# Altium PCB LCDTest.PcbDoc (part 1 of 2)
Units mm, origin at the board's own origin, x right, y up, seen from the top; angles counter-clockwise.
Board outline 42.58 x 45.09 mm, 4 copper layers (Top Layer, Internal Plane 1, Signal Layer 1, Bottom Layer), stack 0.72 mm thick; 136 components, 113 nets, 730 pads, 484 vias.
Unrouted connection lines stored in the file: 1.
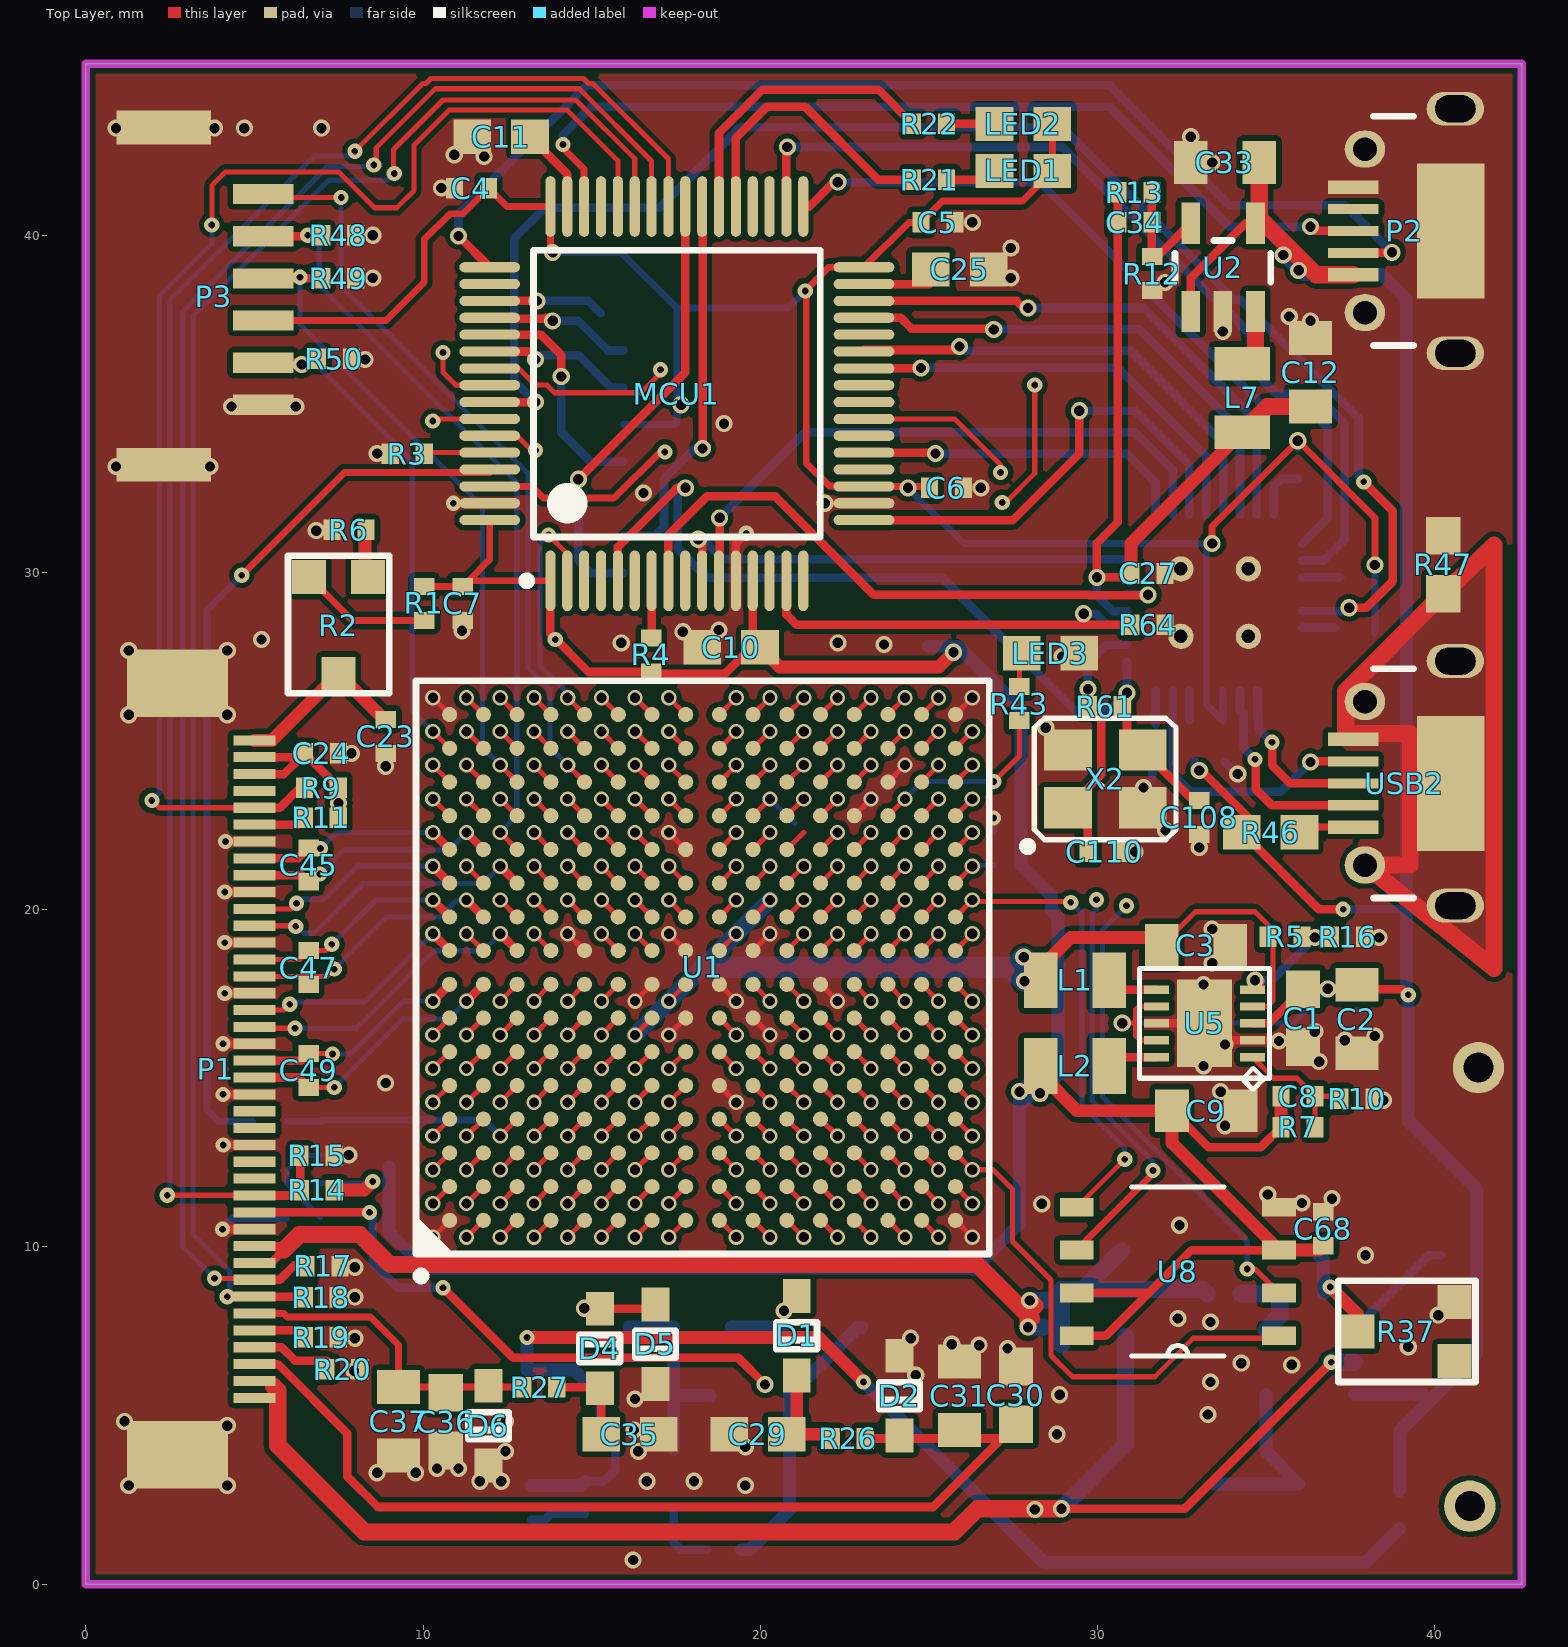
[diagram p0: Top Layer view]
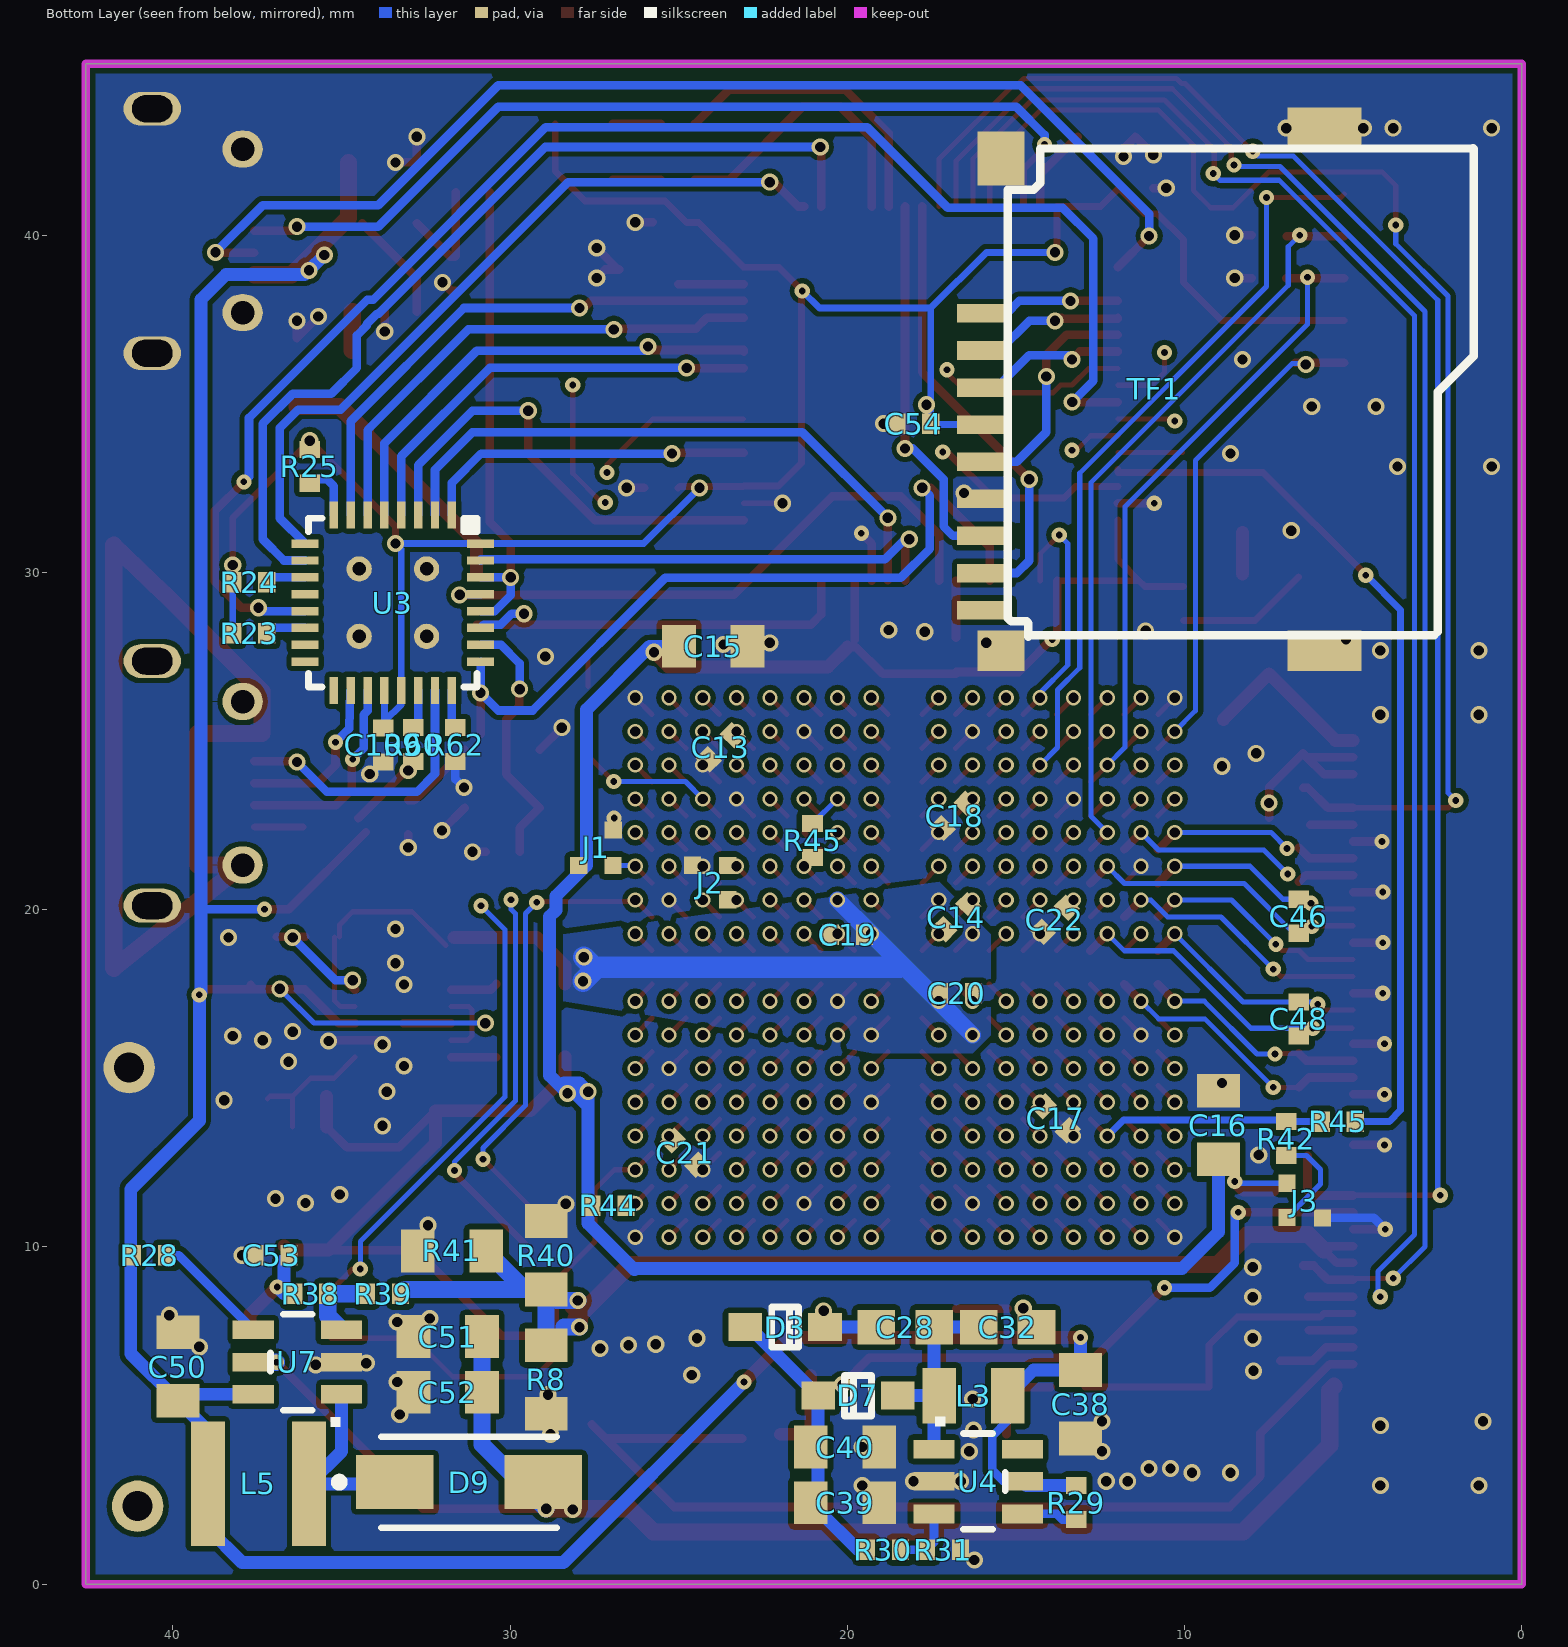
[diagram p1: Bottom Layer view, seen from below]
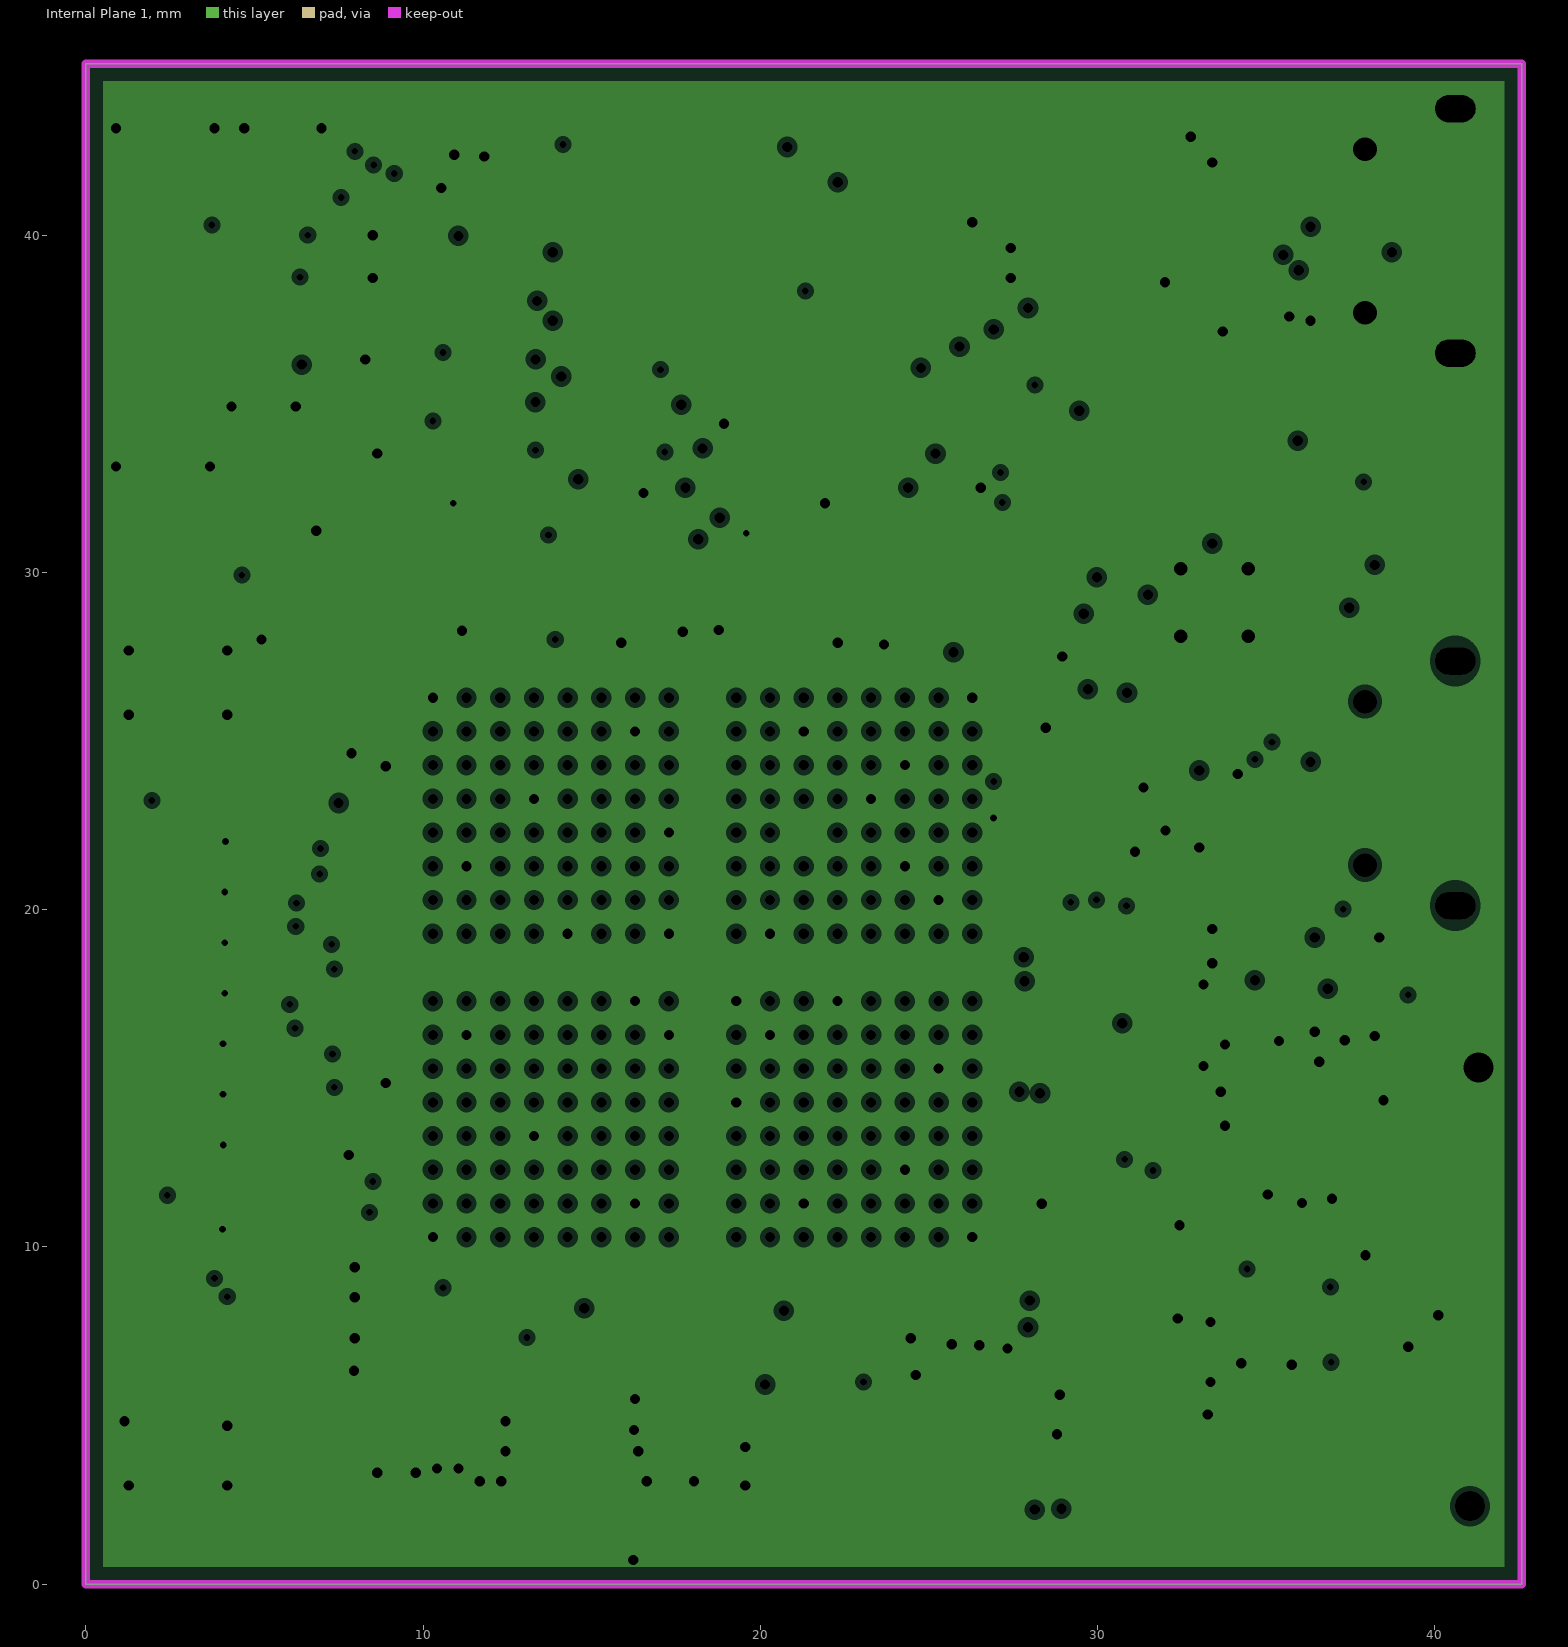
[diagram p2: Internal Plane 1, clearances drawn from the general rule]
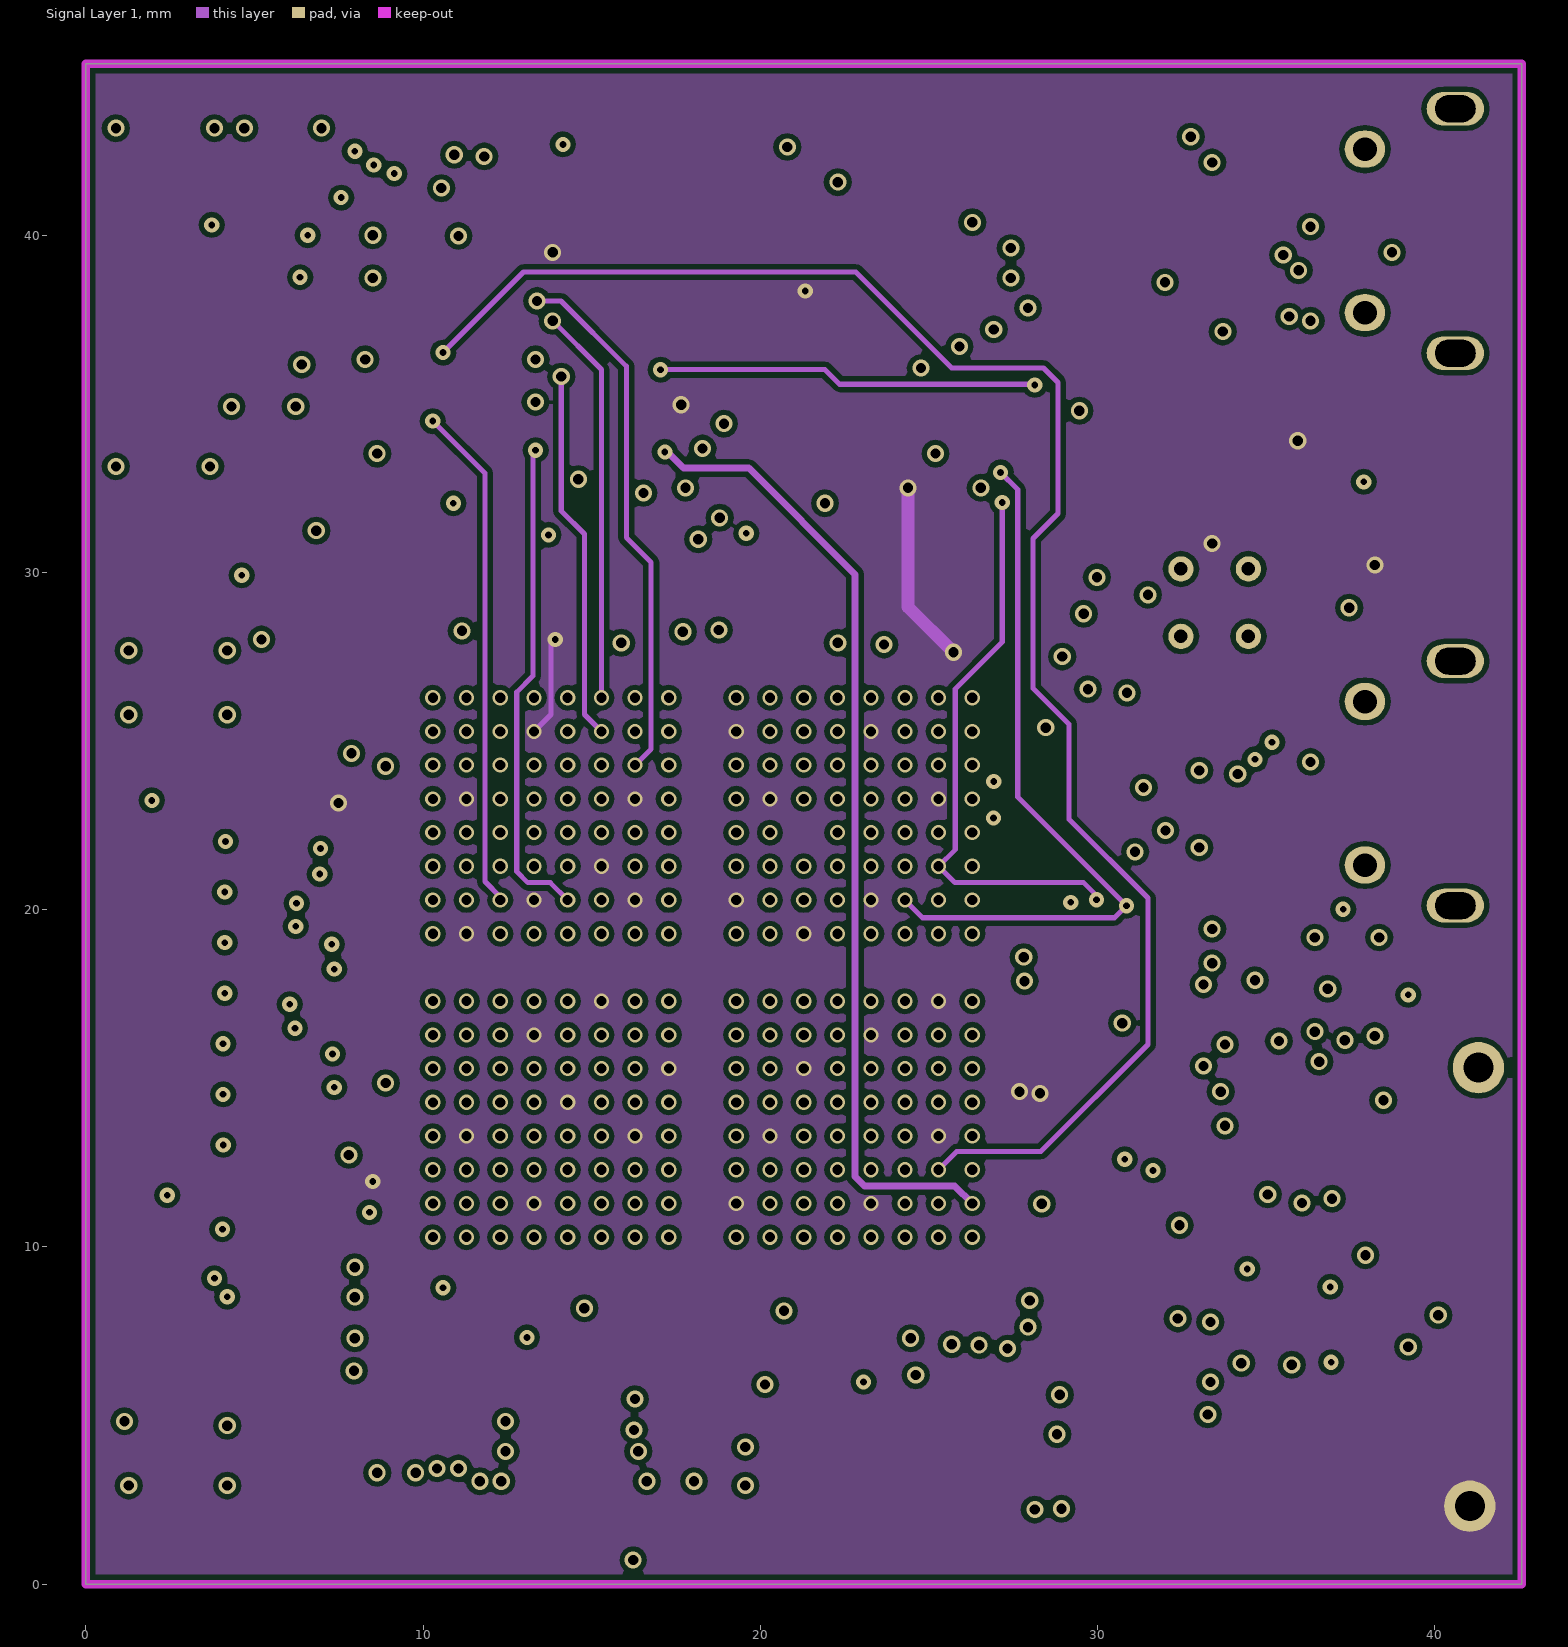
[diagram p3: Signal Layer 1]

## Layer stack, top to bottom
Top Solder: solder mask 0.0102, Solder Resist, Dk 3.5
Top Layer: signal copper 0.0356
Dielectric 1: core 0.196, FR-4, Dk 4.2
Internal Plane 1: plane copper 0.036, net GND
Dielectric 4: prepreg 0.127, Dk 4.2
Signal Layer 1: signal copper 0.036
Dielectric 3: core 0.254, Dk 4.2
Bottom Layer: signal copper 0.0356
Bottom Solder: solder mask 0.0102, Solder Resist, Dk 3.5

## Board outline
0,0 42.581,0 42.581,45.085 0,45.085

## Design rules (kind name [scope] priority, off if disabled: settings)
Clearance PowerPour [InPolygon AND (InNet('1.8D') OR InNet('1.2') OR InNet('3.3D'))] p1: gap=0.152 ignorepadtopadclearanceinfootprint=FALSE except(0: Arc-Hole Track-Hole SMDPad-Hole THPad-Hole Via-Hole Fill-Hole Poly-Hole Region-Hole Text-Hole)
Clearance "50R trace" [InNetClass('50R') vs InPolygon] p2: gap=0.508 ignorepadtopadclearanceinfootprint=FALSE except(0: Arc-Hole Track-Hole SMDPad-Hole THPad-Hole Via-Hole Fill-Hole Poly-Hole Region-Hole Text-Hole)
Clearance [All] p3: gap=0.152 ignorepadtopadclearanceinfootprint=FALSE except(0: Arc-Hole Track-Hole SMDPad-Hole THPad-Hole Via-Hole Fill-Hole Poly-Hole Region-Hole Text-Hole)
DiffPairsRouting USB_HS [InNet('USB_HS_P')     or InNet('USB_HS_N')] p1: maxlimit=0.254 minlimit=0.152 mostfreqgap=0.152 toplayer_minwidth=0.254 toplayer_maxwidth=0.381 toplayer_prefwidth=0.381 midlayer1_minwidth=0.305 midlayer1_maxwidth=0.381 midlayer1_prefwidth=0.381 bottomlayer_minwidth=0.254 bottomlayer_maxwidth=0.381 bottomlayer_prefwidth=0.381 maxuncoupledlength=12.7
DiffPairsRouting [All] p2: maxlimit=0.254 minlimit=0.152 mostfreqgap=0.203 toplayer_minwidth=0.152 toplayer_maxwidth=0.381 toplayer_prefwidth=0.254 midlayer1_minwidth=0.152 midlayer1_maxwidth=0.381 midlayer1_prefwidth=0.254 bottomlayer_minwidth=0.152 bottomlayer_maxwidth=0.381 bottomlayer_prefwidth=0.254 maxuncoupledlength=12.7
HoleToHoleClearance [All] p1: gap=0.2 allowstackedmicrovias=TRUE
MatchedLengths [InNet('USB_HS_P') or InNet('USB_HS_N')] p1: tolerance=1.27 checknetsindiffpair=TRUE checkdiffpairvsdiffpair=FALSE checkxsignals=FALSE checkothers=FALSE
MinimumSolderMaskSliver [All] p1 off: minsoldermaskwidth=0.254
PlaneClearance [All] p1: clearance=0.152
PlaneConnect [All] p1: planeconnectstyle=Direct reliefexpansion=0.508 reliefentries=4 reliefconductorwidth=0.254 reliefairgap=0.254
PolygonConnect [All] p1: connectstyle=Direct reliefconductorwidth=0.254 reliefentries=4 polygonreliefangle="90 Angle" airgapwidth=0.254
RoomDefinition USB_HS_PHY [InComponentClass('USB_HS_PHY')] p1 off: confinementstyle=ConfineIn formatcopy=TRUE lockcomponents=FALSE outline 43.866,96.19 145.009,96.19 145.009,105.334 43.866,105.334
RoomDefinition mcu [InComponentClass('mcu')] p2 off: confinementstyle=ConfineIn formatcopy=TRUE lockcomponents=FALSE outline 43.866,55.042 171.45,55.042 171.45,71.349 43.866,71.349
RoomDefinition LCD [InComponentClass('LCD')] p3 off: confinementstyle=ConfineIn formatcopy=TRUE lockcomponents=FALSE outline 43.866,25.984 118.288,25.984 118.288,53.772 43.866,53.772
RoomDefinition FPGA [InComponentClass('FPGA')] p4 off: confinementstyle=ConfineIn formatcopy=TRUE lockcomponents=FALSE outline 43.866,2.819 119.456,2.819 119.456,24.714 43.866,24.714
RoomDefinition power [InComponentClass('power')] p5 off: confinementstyle=ConfineIn formatcopy=TRUE lockcomponents=FALSE outline 72.542,9.017 109.398,9.017 109.398,26.746 72.542,26.746
RoutingVias [All] p1: holewidth=0.3 width=0.45 viastyle="Through Hole" minholewidth=0.2 minwidth=0.45 maxholewidth=0.711 maxwidth=1.27
ShortCircuit ShortCircuit_NoNet [not InAnyNet vs not InAnyNet] p1: allowed=TRUE
ShortCircuit [not InNet('No Net') vs not InNet('No Net')] p2: allowed=FALSE
SilkToBoardRegionClearance [All] p1 off:
SilkToSilkClearance [All] p1 off: silktosilkclearance=0.254
SilkToSolderMaskClearance [IsPad] p1 off: minsilkscreentomaskgap=0.254 clearancetoexposedcopper=TRUE
SolderMaskExpansion [All] p1: expansion=0.051
Width Width_1 [InNetClass('50R')] p1: maxlimit=0.752 minlimit=0.134 preferedwidth=0.64 toplayer_minwidth=0.232 toplayer_maxwidth=0.33 toplayer_prefwidth=0.277 midlayer1_maxwidth=0.198 midlayer1_prefwidth=0.164 bottomlayer_minwidth=0.544 impedancedriven=TRUE minimp=45.000000 maximp=55.000000 favimp=50.000000
Width [All] p2: maxlimit=1.524 minlimit=0.152 preferedwidth=0.152
21 further rules are at their usual default settings.

## Classes and differential pairs
net class FPGA_IO[7..0]: FPGA_IO0 FPGA_IO1 FPGA_IO2 FPGA_IO3 FPGA_IO4 FPGA_IO5 FPGA_IO6 FPGA_IO7
net class USB_HS_D[9..0]: USB_HS_D0 USB_HS_D1 USB_HS_D2 USB_HS_D3 USB_HS_D4 USB_HS_D5 USB_HS_D6 USB_HS_D7 USB_HS_D8 USB_HS_D9
component class USB_HS_PHY: C27 C108 C109 C110 R23 R24 R25 R46 R47 R60 R61 R62 R64 U3 USB2 X2
component class mcu: C4 C5 C6 C7 C10 C11 C25 C54 LED1 LED2 MCU1 P2 R3 R4 R21 R22 TF1
component class LCD: C23 C24 C45 C46 C47 C48 C49 P1 R1 R2 R6 R9 R11 R14 R15 R17 R18 R19 R20
component class FPGA: C13 C14 C15 C16 C17 C18 C19 C20 C21 C22 C68 J1 J2 J3 LED3 P3 R42 R43 R44 R45 R48 R49 R50 U1 U8
component class power: C1 C2 C3 C8 C9 C12 C28 C29 C30 C31 C32 C33 C34 C35 C36 C37 C38 C39 C40 C50 C51 C52 C53 D1 D2 D3 D4 D5 D6 D7 D9 L1 L2 L3 L5 L7 R5 R7 R8 R10 R12 R13 R16 R26 R27 R28 R29 R30 R31 R37 R38 R39 R40 R41 U2 U4 U5 U7
differential pair USB_HS: +USB_HS_P -USB_HS_N
differential pair CK: +CK_P -CK_N
differential pair D0: +D0_P -D0_N
differential pair D1: +D1_P -D1_N
differential pair D2: +D2_P -D2_N
differential pair D3: +D3_P -D3_N

## Components (designator, comment, footprint, x,y, rotation, side; value= is the part's Value field where it differs from the comment)
C1 "1uF" 0603 36.097,16.781 r90 top
C2 "10UF" 0805 37.697,16.755 r90 top
C3 "10uF" 0805 32.922,18.94 r180 top
C4 "0.1uF * 4" 0402 11.43,41.402 r0 top
C5 "1n" 0402 25.273,40.386 r180 top
C6 "1n" 0402 25.527,32.512 r180 top
C7 "1n" 0402 11.176,29.083 r90 top
C8 "33pF" 0402 35.944,14.469 r0 top
C9 "10uF" 0805 33.226,14.037 r180 top
C10 "4.7uF" 0603 19.126,27.788 r0 top
C11 "2.2uF" 0603 12.319,42.926 r180 top
C12 "Cap" 0805 36.322,35.941 r270 top
C13 "0.1uF" 0402 23.749,24.816 r315 bottom
C14 "0.1uF" 0402 16.764,19.787 r315 bottom
C15 "Cap" 0805 23.978,27.813 r0 bottom
C16 "Cap" 0805 8.992,13.614 r270 bottom
C17 "0.1uF" 0402 13.818,13.818 r225 bottom
C18 "0.1uF" 0402 16.815,22.784 r315 bottom
C19 "0.1uF" 0402 19.99,19.253 r0 bottom
C20 "0.1uF" 0402 16.764,17.526 r180 bottom
C21 "0.1uF" 0402 24.816,12.802 r225 bottom
C22 "0.1uF" 0402 13.843,19.71 r315 bottom
C23 "0.1uF" 0402 8.89,25.146 r270 top
C24 "1uF" 0402 6.985,24.638 r0 top
C25 "2.2uF" 0603 25.908,38.989 r0 top
C27 "1uF" 0402 31.496,29.972 r0 top
C28 "1uF" 0603 18.288,7.62 r180 bottom
C29 "0.1uF" 0603 19.939,4.445 r180 top
C30 "1uF" 0603 27.584,5.588 r90 top
C31 "10uF" 0805 25.908,5.588 r270 top
C32 "1uF" 0603 15.24,7.62 r0 bottom
C33 "Cap" 0805 33.782,42.164 r0 top
C34 "22pF" 0402 31.115,40.386 r0 top
C35 "0.1uF" 0603 16.129,4.445 r0 top
C36 "1uF" 0603 10.668,4.826 r270 top
C37 "10uF" 0805 9.271,4.826 r90 top
C38 "10uF" 0805 13.081,5.334 r90 bottom
C39 "10uF" 0805 20.066,2.413 r0 bottom
C40 "10uF" 0805 20.066,4.064 r0 bottom
C45 "NC" 0402 6.604,21.336 r270 top
C46 "NC" 0402 6.604,19.812 r270 bottom
C47 "NC" 0402 6.604,18.288 r270 top
C48 "NC" 0402 6.604,16.764 r270 bottom
C49 "NC" 0402 6.604,15.24 r270 top
C50 "10uF" 0805 39.853,6.452 r270 bottom
C51 "10uF" 0805 31.852,7.341 r180 bottom
C52 "10uF" 0805 31.852,5.69 r180 bottom
C53 "0.1uF" 0402 37.059,9.754 r0 bottom
C54 "0.1uF" 0402 18.034,34.417 r180 bottom
C68 "0.1uF" 0402 36.703,10.541 r270 top
C108 "10pF" 0402 33.02,22.733 r90 top
C109 "1uF" 0402 33.757,24.892 r270 bottom
C110 "10pF" 0402 30.226,21.717 r180 top
D1 "Diode 1N4148" LC-SOD-323 21.082,7.366 r90 top
D2 "D Zener, 15V" LC-SOD-323 24.13,5.588 r90 top
D3 "Diode 1N4148" LC-SOD-323 21.844,7.62 r0 bottom
D4 "Diode 1N4148" LC-SOD-323 15.24,6.985 r270 top
D5 "Diode 1N4148" LC-SOD-323 16.891,7.112 r90 top
D6 "D Zener, 6.8V" LC-SOD-323 11.938,4.699 r90 top
D7 "Diode" LC-SOD-323 19.685,5.588 r180 bottom
D9 "Diode" SMA 31.217,3.023 r180 bottom
J1 "jumper" 0402J 26.949,21.311 r0 bottom
J2 "jumper" 0402J 23.546,21.311 r270 bottom
J3 "jumper" 0402J 6.96,10.871 r90 bottom
L1 "2.2UH" 0806 29.337,17.907 r180 top
L2 "2.2uH" 0806 29.337,15.367 r180 top
L3 "10uH" 0806 16.256,5.588 r0 bottom
L5 "6.8uH" L4015 38.964,2.972 r180 bottom
L7 "2.2uH" 0806 34.29,35.179 r270 top
LED1 "LED0" 0603 27.813,41.91 r180 top
LED2 "LED0" 0603 27.813,43.307 r180 top
LED3 "LED0" 0603 28.6,27.61 r0 top
MCU1 "STM32F103R8T6" LQFP64_N 17.526,35.306 r90 top
P1 "LCD_40P_LVDS" FPC-0.5mm-40 5,25.024 r270 top
P2 "SWD_MicroUSB" MICRO-YZX 43.434,40.132 r90 top
P3 "JTAG-6P" GH1.25-6 3.81,38.1 r270 top
R1 "0R" 0402 10.033,29.083 r90 top
R2 "RPot" POT1 7.493,28.321 r180 top
R3 "10k" 0402 9.525,33.528 r0 top
R4 "10k" 0402 16.764,27.559 r270 top
R5 "180k" 0402 35.563,19.194 r0 top
R6 "1k" 0402 7.798,31.267 r0 top
R7 "300k" 0402 35.944,13.555 r0 top
R8 "1R" 0805 28.931,6.071 r90 bottom
R9 "10k" 0402 6.985,23.622 r180 top
R10 "68k" 0402 37.697,14.393 r0 top
R11 "10k" 0402 6.985,22.733 r180 top
R12 "10k" 0402 31.623,38.862 r90 top
R13 "45k" 0402 31.115,41.275 r180 top
R14 "10k" 0402 6.858,11.684 r0 top
R15 "NC" 0402 6.858,12.7 r180 top
R16 "180k" 0402 37.417,19.194 r0 top
R17 "10k" 0402 7.036,9.423 r180 top
R18 "10k" 0402 6.985,8.509 r180 top
R19 "10k" 0402 6.985,7.315 r180 top
R20 "10k" 0402 7.62,6.375 r180 top
R21 "10k" 0402 25.019,41.656 r0 top
R22 "10k" 0402 25.019,43.307 r0 top
R23 "10k" 0402 37.719,28.194 r0 bottom
R24 "10k" 0402 37.719,29.718 r0 bottom
R25 "10k" 0402 35.941,33.147 r90 bottom
R26 "1k" 0402 22.606,4.318 r0 top
R27 "1k" 0402 13.462,5.842 r180 top
R28 "45k" 0402 40.691,9.754 r0 bottom
R29 "45k" 0402 13.208,2.413 r90 bottom
R30 "150k" 0402 18.923,1.016 r0 bottom
R31 "10k" 0402 17.145,1.016 r0 bottom
R37 "RPot" POT1 39.04,7.493 r90 top
R38 "1k" 0402 35.916,8.611 r180 bottom
R39 "1k" 0402 33.757,8.611 r0 bottom
R40 "1R" 0805 28.931,9.754 r270 bottom
R41 "1R" 0805 31.725,9.881 r180 bottom
R42 "10k" 0402 6.985,13.208 r90 bottom
R43 "10k" 0402 27.686,26.111 r90 top
R44 "10k" 0402 27.076,11.227 r180 bottom
R45 "1k" 0402 5.436,13.716 r0 bottom
R45 "NC" 0402 21.031,22.047 r90 bottom
R46 "FB" 0603 35.128,22.301 r0 top
R47 "FB" 0603 40.259,30.226 r90 top
R48 "10k" 0402 7.493,40.005 r0 top
R49 "10k" 0402 7.493,38.735 r0 top
R50 "10k" 0402 7.366,36.347 r0 top
R60 "10k" 0402 32.868,24.892 r90 bottom
R61 "1MR" 0402 30.226,26.035 r0 top
R62 "8.06k 1%" 0402 31.623,24.892 r90 bottom
R64 "10k" 0402 31.496,28.448 r0 top
TF1 "TF" TF 5.842,27.686 r90 bottom
U1 "XC6SLX16-2FT256C" FT256 18.288,18.288 r90 top
U2 "RT8059" SOT23-5 33.718,39.039 r0 top
U3 "USB3320" USB3300 33.477,29.108 r270 bottom
U4 "SY7152" SOT23-6 16.129,3.048 r270 bottom
U5 "Tps62410" DFN-10P-3X3 33.15,16.628 r180 top
U7 "SY7200" SOT23-6 36.297,6.579 r90 bottom
U8 "M25P16" SO8 32.385,9.271 r180 top
USB2 "USB Micro Type B" MICRO-YZX 43.434,23.749 r90 top
X2 "24mhz" OSCILLATOR-3.2X2.5 30.226,23.876 r0 top

## Footprints (in the part's own frame and the unit in brackets; to place one, negate y for a bottom-side part, rotate by r counter-clockwise, add the part's x,y. Pads: shape width x height; smd on the part's side, far side on the other; paste and mask are expansions set on the pad)
0402 [mil] "0402-RES"
  rect 20x24 smd: 1(-19.68,0) 2(20,0)
0402J [mil] "0402-RES"
  rect 20x20 smd: 1(40,0) 2(0,0) 3(-0.35,-41.34)
0603 [mil] "0603-RES"
  rect 44x40 smd: 1(-33.46,0) 2(34,0)
0805 [mm]
  rect 1x1.27 smd: 1(-1.016,0) 2(1.016,0)
  body extent -1.27,-0.76 1.27,0.76, height 0.8
0806 [mm]
  rect 1x1.65 smd: 1(-1.016,0) 2(1.016,0)
  body extent -1,-0.8 1,0.8, height 0.5
DFN-10P-3X3 [mm]
  rect 0.75x0.25 smd mask+0.064: 1(-1.451,0.999) 2(-1.451,0.499) 3(-1.451,-0.001) 4(-1.451,-0.501) 5(-1.451,-1.001) 6(1.4,-1.001) 7(1.4,-0.501) 8(1.4,-0.001) 9(1.4,0.499) 10(1.4,0.999)
  rect 1.64x2.6 smd: 11(-0.025,-0.001)
  silkscreen extent -1.96,-1.63 1.9,1.95
FPC-0.5mm-40 [mm]
  rect 2x3 smd: 0(-1.69,-2.285) 0(21.19,-2.285)
  rect 0.3x1.25 smd: 1(0,0) 2(0.5,0) 3(1,0) 4(1.5,0) 5(2,0) 6(2.5,0) 7(3,0) 8(3.5,0) 9(4,0) 10(4.5,0) 11(5,0) 12(5.5,0) 13(6,0) 14(6.5,0) 15(7,0) 16(7.5,0) 17(8,0) 18(8.5,0) 19(9,0) 20(9.5,0) 21(10,0) 22(10.5,0) 23(11,0) 24(11.5,0) 25(12,0) 26(12.5,0) 27(13,0) 28(13.5,0) 29(14,0) 30(14.5,0) 31(15,0) 32(15.5,0) 33(16,0) 34(16.5,0) 35(17,0) 36(17.5,0) 37(18,0) 38(18.5,0) 39(19,0) 40(19.5,0)
FT256 [mm] "BGA, 256-Leads, Body 17x17mm, Pitch 1mm"
  round 0.45 smd: A1(-7.5,7.5) A2(-6.5,7.5) A3(-5.5,7.5) A4(-4.5,7.5) A5(-3.5,7.5) A6(-2.5,7.5) A7(-1.5,7.5) A8(-0.5,7.5) A9(0.5,7.5) A10(1.5,7.5) A11(2.5,7.5) A12(3.5,7.5) A13(4.5,7.5) A14(5.5,7.5) A15(6.5,7.5) A16(7.5,7.5) B1(-7.5,6.5) B2(-6.5,6.5) B3(-5.5,6.5) B4(-4.5,6.5) B5(-3.5,6.5) B6(-2.5,6.5) B7(-1.5,6.5) B8(-0.5,6.5) B9(0.5,6.5) B10(1.5,6.5) B11(2.5,6.5) B12(3.5,6.5) B13(4.5,6.5) B14(5.5,6.5) B15(6.5,6.5) B16(7.5,6.5) C1(-7.5,5.5) C2(-6.5,5.5) C3(-5.5,5.5) C4(-4.5,5.5) C5(-3.5,5.5) C6(-2.5,5.5) C7(-1.5,5.5) C8(-0.5,5.5) C9(0.5,5.5) C10(1.5,5.5) C11(2.5,5.5) C12(3.5,5.5) C13(4.5,5.5) C14(5.5,5.5) C15(6.5,5.5) C16(7.5,5.5) D1(-7.5,4.5) D2(-6.5,4.5) D3(-5.5,4.5) D4(-4.5,4.5) D5(-3.5,4.5) D6(-2.5,4.5) D7(-1.5,4.5) D8(-0.5,4.5) D9(0.5,4.5) D10(1.5,4.5) D11(2.5,4.5) D12(3.5,4.5) D13(4.5,4.5) D14(5.5,4.5) D15(6.5,4.5) D16(7.5,4.5) E1(-7.5,3.5) E2(-6.5,3.5) E3(-5.5,3.5) E4(-4.5,3.5) E5(-3.5,3.5) E6(-2.5,3.5) E7(-1.5,3.5) E8(-0.5,3.5) E9(0.5,3.5) E10(1.5,3.5) E11(2.5,3.5) E12(3.5,3.5) E13(4.5,3.5) E14(5.5,3.5) E15(6.5,3.5) E16(7.5,3.5) F1(-7.5,2.5) F2(-6.5,2.5) F3(-5.5,2.5) F4(-4.5,2.5) F5(-3.5,2.5) F6(-2.5,2.5) F7(-1.5,2.5) F8(-0.5,2.5) F9(0.5,2.5) F10(1.5,2.5) F11(2.5,2.5) F12(3.5,2.5) F13(4.5,2.5) F14(5.5,2.5) F15(6.5,2.5) F16(7.5,2.5) G1(-7.5,1.5) G2(-6.5,1.5) G3(-5.5,1.5) G4(-4.5,1.5) G5(-3.5,1.5) G6(-2.5,1.5) G7(-1.5,1.5) G8(-0.5,1.5) G9(0.5,1.5) G10(1.5,1.5) G11(2.5,1.5) G12(3.5,1.5) G13(4.5,1.5) G14(5.5,1.5) G15(6.5,1.5) G16(7.5,1.5) H1(-7.5,0.5) H2(-6.5,0.5) H3(-5.5,0.5) H4(-4.5,0.5) H5(-3.5,0.5) H6(-2.5,0.5) H7(-1.5,0.5) H8(-0.5,0.5) H9(0.5,0.5) H10(1.5,0.5) H11(2.5,0.5) H12(3.5,0.5) H13(4.5,0.5) H14(5.5,0.5) H15(6.5,0.5) H16(7.5,0.5) J1(-7.5,-0.5) J2(-6.5,-0.5) J3(-5.5,-0.5) J4(-4.5,-0.5) J5(-3.5,-0.5) J6(-2.5,-0.5) J7(-1.5,-0.5) J8(-0.5,-0.5) J9(0.5,-0.5) J10(1.5,-0.5) J11(2.5,-0.5) J12(3.5,-0.5) J13(4.5,-0.5) J14(5.5,-0.5) J15(6.5,-0.5) J16(7.5,-0.5) K1(-7.5,-1.5) K2(-6.5,-1.5) K3(-5.5,-1.5) K4(-4.5,-1.5) K5(-3.5,-1.5) K6(-2.5,-1.5) K7(-1.5,-1.5) K8(-0.5,-1.5) K9(0.5,-1.5) K10(1.5,-1.5) K11(2.5,-1.5) K12(3.5,-1.5) K13(4.5,-1.5) K14(5.5,-1.5) K15(6.5,-1.5) K16(7.5,-1.5) L1(-7.5,-2.5) L2(-6.5,-2.5) L3(-5.5,-2.5) L4(-4.5,-2.5) L5(-3.5,-2.5) L6(-2.5,-2.5) L7(-1.5,-2.5) L8(-0.5,-2.5) L9(0.5,-2.5) L10(1.5,-2.5) L11(2.5,-2.5) L12(3.5,-2.5) L13(4.5,-2.5) L14(5.5,-2.5) L15(6.5,-2.5) L16(7.5,-2.5) M1(-7.5,-3.5) M2(-6.5,-3.5) M3(-5.5,-3.5) M4(-4.5,-3.5) M5(-3.5,-3.5) M6(-2.5,-3.5) M7(-1.5,-3.5) M8(-0.5,-3.5) M9(0.5,-3.5) M10(1.5,-3.5) M11(2.5,-3.5) M12(3.5,-3.5) M13(4.5,-3.5) M14(5.5,-3.5) M15(6.5,-3.5) M16(7.5,-3.5) N1(-7.5,-4.5) N2(-6.5,-4.5) N3(-5.5,-4.5) N4(-4.5,-4.5) N5(-3.5,-4.5) N6(-2.5,-4.5) N7(-1.5,-4.5) N8(-0.5,-4.5) N9(0.5,-4.5) N10(1.5,-4.5) N11(2.5,-4.5) N12(3.5,-4.5) N13(4.5,-4.5) N14(5.5,-4.5) N15(6.5,-4.5) N16(7.5,-4.5) P1(-7.5,-5.5) P2(-6.5,-5.5) P3(-5.5,-5.5) P4(-4.5,-5.5) P5(-3.5,-5.5) P6(-2.5,-5.5) P7(-1.5,-5.5) P8(-0.5,-5.5) P9(0.5,-5.5) P10(1.5,-5.5) P11(2.5,-5.5) P12(3.5,-5.5) P13(4.5,-5.5) P14(5.5,-5.5) P15(6.5,-5.5) P16(7.5,-5.5) R1(-7.5,-6.5) R2(-6.5,-6.5) R3(-5.5,-6.5) R4(-4.5,-6.5) R5(-3.5,-6.5) R6(-2.5,-6.5) R7(-1.5,-6.5) R8(-0.5,-6.5) R9(0.5,-6.5) R10(1.5,-6.5) R11(2.5,-6.5) R12(3.5,-6.5) R13(4.5,-6.5) R14(5.5,-6.5) R15(6.5,-6.5) R16(7.5,-6.5) T1(-7.5,-7.5) T2(-6.5,-7.5) T3(-5.5,-7.5) T4(-4.5,-7.5) T5(-3.5,-7.5) T6(-2.5,-7.5) T7(-1.5,-7.5) T8(-0.5,-7.5) T9(0.5,-7.5) T10(1.5,-7.5) T11(2.5,-7.5) T12(3.5,-7.5) T13(4.5,-7.5) T14(5.5,-7.5) T15(6.5,-7.5) T16(7.5,-7.5)
  silkscreen extent -9.27,-8.5 8.5,8.5, body extent -8.5,-8.5 8.5,8.5, height 1.55
GH1.25-6 [mm]
  rect 1x2.8 smd: 0(-5.1,-1.5) 0(4.9,-1.5)
  rect 0.6x1.8 smd: 1(-3.125,1.45) 2(-1.875,1.45) 3(-0.625,1.45) 4(0.625,1.45) 5(1.875,1.45) 6(3.125,1.45)
  body extent -5.48,-3.1 5.27,1.75, height 4.25
L4015 [mm]
  rect 1x3.7 smd: 1(0,0) 2(3,0)
LC-SOD-323 [mm]
  rect 1x0.83 smd: 1(1.18,0) 2(-1.18,0)
  silkscreen extent -0.4,-0.6 0.4,0.6, body extent -1.35,-0.62 1.35,0.62, height 1.1
LQFP64_N [mm]
  oval 1.8x0.3 smd: 1(-5.55,3.75) 2(-5.55,3.25) 3(-5.55,2.75) 4(-5.55,2.25) 5(-5.55,1.75) 6(-5.55,1.25) 7(-5.55,0.75) 8(-5.55,0.25) 9(-5.55,-0.25) 10(-5.55,-0.75) 11(-5.55,-1.25) 12(-5.55,-1.75) 13(-5.55,-2.25) 14(-5.55,-2.75) 15(-5.55,-3.25) 16(-5.55,-3.75) 33(5.55,-3.75) 34(5.55,-3.25) 35(5.55,-2.75) 36(5.55,-2.25) 37(5.55,-1.75) 38(5.55,-1.25) 39(5.55,-0.75) 40(5.55,-0.25) 41(5.55,0.25) 42(5.55,0.75) 43(5.55,1.25) 44(5.55,1.75) 45(5.55,2.25) 46(5.55,2.75) 47(5.55,3.25) 48(5.55,3.75)
  oval 0.3x1.8 smd: 17(-3.75,-5.55) 18(-3.25,-5.55) 19(-2.75,-5.55) 20(-2.25,-5.55) 21(-1.75,-5.55) 22(-1.25,-5.55) 23(-0.75,-5.55) 24(-0.25,-5.55) 25(0.25,-5.55) 26(0.75,-5.55) 27(1.25,-5.55) 28(1.75,-5.55) 29(2.25,-5.55) 30(2.75,-5.55) 31(3.25,-5.55) 32(3.75,-5.55) 49(3.75,5.55) 50(3.25,5.55) 51(2.75,5.55) 52(2.25,5.55) 53(1.75,5.55) 54(1.25,5.55) 55(0.75,5.55) 56(0.25,5.55) 57(-0.25,5.55) 58(-0.75,5.55) 59(-1.25,5.55) 60(-1.75,5.55) 61(-2.25,5.55) 62(-2.75,5.55) 63(-3.25,5.55) 64(-3.75,5.55)
  silkscreen extent -5.67,-4.25 4.25,4.57
MICRO-YZX [mm]
  rect 0.4x1.5 smd: 1(-1.3,5.85) 5(1.3,5.85)
  rect 0.3x1.5 smd: 2(-0.65,5.85) 3(0,5.85) 4(0.65,5.85)
  oval 1x1.7 hole 0.8 slot 1.2 at 90 deg: 5(-3.625,2.82) 5(3.625,2.82)
  oval 1.1x1.2 hole 0.7: 5(-2.425,5.5) 5(2.425,5.5)
  rect 4x2 smd: 5(0,2.95)
  silkscreen extent -3.4,4.05 3.4,5.25, body extent -4.02,0.33 3.98,5.93, height 2.6
OSCILLATOR-3.2X2.5 [mil] "OSCILLATOR-3.2X2.5"
  rect 56x48 smd: 1(-43.31,-33.46) 2(44,-33.46) 3(44,34) 4(-43.31,34)
  silkscreen extent -95,-83 83,71
POT1 [mm]
  rect 1x1 smd: 1(-0.875,-1.55) 2(0.875,-1.55) 3(0,1.325)
  silkscreen extent -1.5,-2.17 1.5,1.9
SMA [mm]
  rect 2.3x1.6 smd: 1(-2.2,0) 2(2.2,0)
  silkscreen extent -3.98,-1.35 2.6,1.35
SO8 [mm]
  rect 1x0.559 smd: 1(-3,1.905) 2(-3,0.635) 3(-3,-0.635) 4(-3,-1.905) 5(3,-1.905) 6(3,-0.635) 7(3,0.635) 8(3,1.905)
  silkscreen extent -1.37,-2.5 1.37,2.5, body extent -3,-2.45 3,2.45, height 1.63
SOT23-5 [mil] "SOT23-5"
  rect 22x48 smd: 1(-37.4,-51.19) 2(0,-51.19) 3(38,-51.19) 4(38,52) 5(-37.4,52)
  silkscreen extent -56,-17 56,32
SOT23-6 [mil] "SOT23-5"
  rect 22x48 smd: 1(-37.4,-51.18) 2(0,-51.18) 3(38,-51.18) 4(38,52) 5(0,52.01) 6(-37.4,52)
  silkscreen extent -76,-50 56,32
TF [mm]
  rect 0.55x1.6 smd: 1(10,10.1) 2(8.9,10.1) 3(7.8,10.1) 4(6.7,10.1) 5(5.6,10.1) 6(4.5,10.1) 7(3.4,10.1) 8(2.3,10.1) 9(1.2,10.1)
  rect 1.2x2.2 smd: SHELL(0,0) SHELL(15.5,0)
  rect 1.2x1.4 smd: SHELL(0,9.6)
  rect 1.6x1.4 smd: SHELL(14.6,9.6)
  silkscreen extent 0.41,-4.42 14.9,9.4
USB3300 [mm]
  round 0.75 hole 0.4: 0(-1,-1) 0(-1,1) 0(1,-1) 0(1,1)
  rect 0.8x0.25 smd: 1(-2.6,1.75) 2(-2.6,1.25) 3(-2.6,0.75) 4(-2.6,0.25) 5(-2.6,-0.25) 6(-2.6,-0.75) 7(-2.6,-1.25) 8(-2.6,-1.75) 17(2.6,-1.75) 18(2.6,-1.25) 19(2.6,-0.75) 20(2.6,-0.25) 21(2.6,0.25) 22(2.6,0.75) 23(2.6,1.25) 24(2.6,1.75)
  rect 0.25x0.8 smd: 9(-1.75,-2.6) 10(-1.25,-2.6) 11(-0.75,-2.6) 12(-0.25,-2.6) 13(0.25,-2.6) 14(0.75,-2.6) 15(1.25,-2.6) 16(1.75,-2.6) 25(1.75,2.6) 26(1.25,2.6) 27(0.75,2.6) 28(0.25,2.6) 29(-0.25,2.6) 30(-0.75,2.6) 31(-1.25,2.6) 32(-1.75,2.6)
  silkscreen extent -2.5,-2.5 2.5,2.5, body extent -2.5,-2.5 2.5,2.5, height 0.85

## Part data
C1 C2: library part CAP/0402
C3 C9 C13 C14 C17 C18 C19 C20 C21 C22 C23 C24 C28 C29 C30 C31 C32 C34 C35 C36 C37 C38 C39 C40 C45 C46 C47 C48 C49 C50 C51 C52 C53: library part Cap, "Capacitor"
C4 C5 C6 C7 C8 C10 C11 C25 C27 C54 C68 C108 C109 C110: library part CAP0402-CAP, "<b>Capacitor</b> / Standard 0603 ceramic capacitor, and 0.1\" leaded capacitor."
C12 C15 C16 C33: "Capacitor"
D1 D3 D4 D5: "High Conductance Fast Diode"
D2 D6: library part "D Zener", "Zener Diode"
D7 D9: "Default Diode"
J1 J2 J3: library part SW-SPDT, "SPDT Subminiature Toggle Switch, Right Angle Mounting, Vertical Actuation"
L1 L2: library part L/2.5*2.0
L3 L5 L7: library part Inductor, "Inductor"
LED1 LED2 LED3: "Typical INFRARED GaAs LED"
MCU1: "STM32 ARM-based 32-bit MCU with 64 Kbytes Flash, 64-pin LQFP, Industrial Temperature"
P2: "Connector SMD USB Micro Type B middle mount"
R1 R3 R4 R5 R6 R7 R8 R9 R10 R11 R12 R13 R14 R15 R16 R17 R18 R19 R20 R21 R22 R23 R24 R25 R26 R27 R28 R29 R30 R31 R38 R39 R40 R41 R42 R43 R44 R45 R45 R46 R47 R48 R49 R50 R60 R61 R62 R64: library part Res2, "Resistor"
R2 R37: "Potentiometer"
U1: "Spartan-6 LX 1.2V FPGA, 186 User I/Os, 256-Ball Fine-Pitch Thin BGA (1.0mm Pitch), Speed Grade 2, Commercial Grade"
USB2: library part USB_Micro_TypeB, "Connector SMD USB Micro Type B middle mount"
X2: library part OSCILLATOR-3.2X2.5, "Crystal Oscillator in 3.2x2.5 SMD"

## Free pads (board coordinates)
  round 1.524 hole 0.889: 0(41.046,2.311) 1(41.3,15.316)

## Via types
v1: diameter 0.45, hole 0.3, Top Layer to Bottom Layer, 255 vias
v2: diameter 0.508, hole 0.305, Top Layer to Bottom Layer, 165 vias
v3: diameter 0.45, hole 0.2, Top Layer to Bottom Layer, 64 vias

## Nets (pads, with @x,y where several pads share a name; then routed paths per layer and width w, separated by ;. In a path a pad name is that pad's centre, name@x,y a point inside that pad or via, vN(x,y) a via of type N, cw(c..) or ccw(c..) an arc to the next point about the centre after c; other vN are vias at no path point)
1.2: C3.2 C19.1 C20.1 L1.2 R5.1 U1.G7 U1.G9 U1.H8 U1.H10 U1.J7 U1.J9 U1.K8 U1.K10 U5.4 | length 32.2
  Top Layer w0.152: v1(16.288,16.288) U1.G7@16.788,16.788 ; v1(16.288,19.288) U1.G9@16.788,18.788 ; v1(17.288,17.288) U1.H8@17.788,17.788 ; v1(17.288,20.288) U1.H10@17.788,19.788 ; U1.J7@18.788,16.788 v1(19.288,16.288) ; U1.J9@18.788,18.788 v1(19.288,19.288) ; U1.K8@19.788,17.788 v1(20.288,17.288) ; U1.K10@19.788,19.788 v1(20.288,20.288) ; C3.2@31.906,18.94 32.905,19.939 34.671,19.939 35.063,19.547 R5.1@35.063,19.194 ; U5.4@34.601,17.129 35.036,17.129 35.205,17.298 R5.1@35.205,19.194
  Top Layer w0.381: L1.2@28.375,17.797 28.375,18.342 29.21,19.177 C3.2@31.668,19.177
  Bottom Layer w0.508: v1(16.288,16.288) v1(17.288,17.288) v1(19.288,19.288) v1(20.288,20.288)
  Bottom Layer w0.635: 18.44,18.288 27.432,18.288 ; v2(27.813,18.593) 27.508,18.288 27.432,18.288 ; v2(27.838,17.882) 27.432,18.288
1.8: C12.2 C27.1 C34.1 L7.2 R13.2 U3.28 U3.30 | length 23
  Top Layer w0.254: R13.2@30.607,41.275 30.607,31.496 29.985,30.874 v2(29.985,29.858) C27.1@30.882,29.858
  Top Layer w0.381: C27.1@30.996,29.972 30.996,30.869 L7.2@34.29,34.163
  Top Layer w0.508: L7.2@34.29,34.163 35.052,34.925 C12.2@36.322,34.925
  Bottom Layer w0.254: U3.28@30.877,28.858 30.451,28.858 29.985,29.324 v2(29.985,29.858) U3.30@30.877,29.858
3.3D: C4.2 C5.2 C6.2 C7.2 C8.1 C9.2 C10.2 C13.1 C14.1 C15.2 C16.2 C17.1 C18.1 C21.1 C22.1 C24.1 C54.2 C68.2 C109.1 J1.1 J2.1 J3.1 L2.2 LED1.1 LED2.1 MCU1.1 MCU1.13 MCU1.19 MCU1.32 MCU1.48 MCU1.64 P1.2 P1.3 P3.4 pad.0 R1.2 R4.2 R7.1 R9.1 R11.1 R14.2 R23.2 R24.2 R25.2 R44.1 R45.2@21.031,22.555 TF1.4 U1.B4 U1.B9 U1.B13 U1.D2 U1.D7 U1.D10 U1.D15 U1.E5 U1.F8 U1.F11 U1.G4 U1.G10 U1.G13 U1.H6 U1.J2 U1.J10 U1.J15 U1.K4 U1.K13 U1.L6 U1.L9 U1.N2 U1.N7 U1.N10 U1.N15 U1.R4 U1.R8 U1.R13 U3.20 U3.21 U3.32 U8.3 U8.7 U8.8 | length 200.6
  Top Layer w0.152: v1(11.288,13.288) U1.B4@11.788,13.788 ; v1(11.288,19.288) U1.B9@11.788,18.788 ; v1(11.288,23.288) U1.B13@11.788,22.788 ; v1(13.288,11.288) U1.D2@13.788,11.788 ; v1(13.288,16.288) U1.D7@13.788,16.788 ; v1(13.288,20.288) U1.D10@13.788,19.788 ; v1(13.288,25.288) U1.D15@13.788,24.788 ; v1(14.288,14.288) U1.E5@14.788,14.788 ; v1(15.288,17.288) U1.F8@15.788,17.788 ; v1(15.288,21.288) U1.F11@15.788,20.788 ; v1(16.288,13.288) U1.G4@16.788,13.788 ; v1(16.288,20.288) U1.G10@16.788,19.788 ; v1(16.288,23.288) U1.G13@16.788,22.788 ; v1(17.288,15.288) U1.H6@17.788,15.788 ; U1.J2@18.788,11.788 v1(19.288,11.288) ; U1.J10@18.788,19.788 v1(19.288,20.288) ; U1.J15@18.788,24.788 v1(19.288,25.288) ; U1.K4@19.788,13.788 v1(20.288,13.288) ; U1.K13@19.788,22.788 v1(20.288,23.288) ; U1.L6@20.788,15.788 v1(21.288,15.288) ; U1.L9@20.788,18.788 v1(21.288,19.288) ; U1.N2@22.788,11.788 v1(23.288,11.288) ; U1.N7@22.788,16.788 v1(23.288,16.288) ; U1.N10@22.788,19.788 v1(23.288,20.288) ; U1.N15@22.788,24.788 v1(23.288,25.288) ; U1.R4@24.788,13.788 v1(25.288,13.288) ; U1.R8@24.788,17.788 v1(25.288,17.288) ; U1.R13@24.788,22.788 v1(25.288,23.288)
  Top Layer w0.203: P3.4@5.26,37.475 8.9,37.475 10.033,38.608 10.033,39.878 10.795,40.64 11.176,40.64 C4.2@11.938,41.402 12.484,40.856 MCU1.48@13.776,40.856 13.776,39.564 v2(13.843,39.497) ; R1.2@10.033,29.591 C7.2@11.176,29.591 C7.2@11.341,29.756 ; MCU1.64@11.976,31.556 11.976,30.391 C7.2@11.341,29.756 ; MCU1.1@13.776,29.756 C7.2@11.341,29.756 ; C6.2@25.019,32.512 24.975,32.556 MCU1.19@23.076,32.556 23.076,32.564 22.046,32.564 21.361,33.249 21.361,38.379 22.038,39.056 MCU1.32@23.076,39.056 24.406,40.386 C5.2@24.765,40.386 25.4,41.021 27.774,41.021 LED1.1@28.663,41.91 LED2.1@28.663,43.307 ; v2(33.401,30.861) 33.401,31.369 v2(35.941,33.909) 38.227,31.623 v2(38.227,30.226)
  Top Layer w0.254: P1.3@5,24.024 5.871,24.024 C24.1@6.371,24.524 ; P1.2@5,24.524 C24.1@6.371,24.524 ; R11.1@7.485,22.733 R9.1@7.485,23.622 7.485,23.638 C24.1@6.485,24.638 C24.1@6.371,24.524 ; MCU1.1@13.776,29.756 13.776,28.185 14.91,27.051 R4.2@16.764,27.051 16.764,27 18.951,27 19.738,27.788 C10.2@19.99,27.788 ; C10.2@19.776,28.001 MCU1.13@19.776,29.756 ; U8.8@29.385,7.366 30.251,7.366 31.521,8.636 ; U8.7@29.385,8.636 31.521,8.636 ; C9.2@32.21,14.037 33.294,12.954 34.843,12.954 R7.1@35.444,13.555 ; U8.3@35.385,9.906 32.791,9.906 31.521,8.636
  Top Layer w0.381: R14.2@7.366,11.684 8.255,11.684 v3(8.509,11.938) ; C10.2@19.99,27.788 20.574,27.203 25.298,27.203 v2(25.73,27.635) ; L2.2@28.375,15.638 28.375,15.059 29.397,14.037 C9.2@32.21,14.037 32.21,13.081 U8.3@35.385,9.906 36.576,9.906 C68.2@36.703,10.033 ; R7.1@35.444,13.555 C8.1@35.444,14.469
  Signal Layer 1 w0.152: v1(13.288,25.288) 13.792,25.792 13.792,28.016 v3(13.919,28.016)
  Signal Layer 1 w0.381: v2(24.384,32.512) 24.384,28.981 v2(25.73,27.635)
  Bottom Layer w0.152: J3.1@6.96,11.887 v3@8.458,11.887 ; v3@13.894,28.016 v3(13.919,28.016) ; v1(20.288,23.288) 20.298,23.288 R45.2@21.031,22.555
  Bottom Layer w0.203: v2(13.843,39.497) 15.875,39.497 17.526,37.846 ; TF1.4@15.942,34.386 17.495,34.386 C54.2@17.526,34.417 17.526,37.846 ; v3(21.336,38.354) 20.828,37.846 17.526,37.846 ; v2(24.384,32.512) 26.038,30.858 U3.32@30.877,30.858 v2@33.398,30.858 ; v2@33.227,30.687 U3.21@33.227,26.508 33.227,26.091 33.727,25.591 U3.20@33.727,26.508 ; R25.2@35.941,33.655 v2(35.941,33.909) v2@35.941,34.036 ; R23.2@38.227,28.194 R24.2@38.227,29.718 v2(38.227,30.226)
  Bottom Layer w0.381: C16.2@8.992,12.37 8.992,10.439 10.075,9.356 26.28,9.356 26.314,9.322 27.686,10.693 27.686,14.173 ; C15.2@24.994,27.813 25.857,27.813 27.737,25.933 27.737,21.311 28.642,20.405 28.642,19.983 28.829,19.796 28.829,15.088 v2(28.296,14.554) 28.067,14.554 27.686,14.173 ; 28.397,14.859 27.94,14.859 v2(27.686,14.605) 27.686,14.173
  other v2: 7.493,23.165 17.653,34.976
5V: C1.2 C2.2 C33.2 C38.2 C50.2 L3.1 L5.1 P2.1 R28.2 R29.2 R46.1 R60.1 U2.1 U2.4 U4.5 U5.3 U5.7 U5.9 U7.6 | length 111.7
  Top Layer w0.152: v2(30.734,16.637) 31.136,16.637 ; U5.9@31.75,16.129 31.263,16.129 31.136,16.256 31.136,16.637 ; U5.7@31.75,17.129 31.226,17.129 31.136,17.039 31.136,16.637
  Top Layer w0.254: U2.1@32.768,37.739 32.768,38.737 34.391,40.36 ; v2(33.02,24.13) v2@33.085,24.13 ; v2@33.172,24.13 v2@33.085,24.13 ; R46.1@34.278,22.301 36.564,20.015 v3(37.287,20.015) ; R46.1@34.507,22.708 v2@33.085,24.13 ; U5.3@34.601,16.629 35.081,16.629 C1.2@36.097,17.644 C2.2@37.57,17.644 ; C2.2@37.697,17.771 C2.2@37.57,17.644 ; 39.037,17.644 C2.2@37.57,17.644
  Top Layer w0.381: v3(13.081,7.315) 21.742,7.315 v3(23.063,5.994)
  Top Layer w0.508: C33.2@34.798,42.164 34.798,40.513 36.479,38.832 P2.1@37.584,38.832
  Bottom Layer w0.152: v2(30.734,16.637) 35.814,16.637 v2(36.83,17.653)
  Bottom Layer w0.254: U4.5@14.808,3.048 15.367,3.048 15.697,3.378 15.697,4.394 15.24,4.851 L3.1@15.24,5.588 ; R60.1@32.893,24.155 R60.1@32.893,24.392 ; v3(37.287,20.015) 39.167,20.015
  Bottom Layer w0.381: v3(13.081,7.315) C38.2@13.081,6.35 14.478,6.35 L3.1@15.24,5.588 ; R29.2@13.208,2.921 14.681,2.921 U4.5@14.808,3.048 ; v3(23.063,5.994) 28.423,0.635 37.948,0.635 L5.1@38.964,1.651 ; v2(35.509,39.421) v2(35.966,38.964) 36.093,38.837 38.43,38.837 39.167,38.1 39.167,20.015 39.167,17.526 v3(39.218,17.475) 39.218,13.741 41.25,11.709 41.25,6.833 C50.2@39.853,5.436 38.964,4.547 L5.1@38.964,2.769 ; U7.6@37.617,5.629 C50.2@39.66,5.629
AVDD: C39.2 C40.2 D3.1 D7.2 P1.29 R30.2 | length 26.4
  Top Layer w0.254: P1.29@5,11.024 v3(8.407,11.024) ; v3(10.592,8.788) 12.669,6.711 19.349,6.711 v2(20.142,5.918)
  Bottom Layer w0.254: v3(8.407,11.024) 8.509,10.922 8.509,9.525 9.246,8.788 v3(10.592,8.788)
  Bottom Layer w0.381: R30.2@19.431,1.016 19.685,1.016 20.865,2.196 D7.2@20.865,5.588 22.897,7.62 D3.1@23.024,7.62
CCLK: MCU1.55 U1.R11 U8.6 | length 51
  Top Layer w0.152: MCU1.55@11.976,36.056 12.839,36.056 13.335,35.56 13.669,35.56 13.897,35.331 16.459,35.331 17.145,36.017 v3(17.043,36.017) ; U1.R11@24.788,20.788 v1(25.288,21.288) ; v3@27.178,31.979 v3@27.28,32.08 ; v3(27.178,32.08) v3@27.28,32.08 ; v3(28.142,35.564) 28.142,32.942 v3@27.28,32.08
  Top Layer w0.203: U8.6@29.385,9.906 31.699,12.22 31.699,12.319 v3(31.648,12.268)
  Signal Layer 1 w0.152: v3(17.043,36.017) 21.92,36.017 22.352,35.585 28.12,35.585 v3(28.142,35.564) ; v3(27.178,32.08) 27.178,27.94 25.781,26.543 25.781,21.781 v1(25.288,21.288) 25.773,20.803 29.591,20.803 30.023,20.371 29.972,20.32 v3(29.972,20.295)
  Bottom Layer w0.152: v3(28.142,35.564) v3@28.169,35.537 ; v3(29.972,20.295) 29.972,20.015 29.845,19.888 29.845,14.326 31.648,12.523 v3(31.648,12.268)
CK_N: C48.1 P1.17 U1.A9 | length 6.9
  Top Layer w0.152: P1.17@5,17.024 5.873,17.024 v3(6.045,17.196)
  Top Layer w0.254: v1(10.288,19.288) U1.A9@10.788,18.788
  Bottom Layer w0.152: v3(6.045,17.196) 6.113,17.264 C48.1@6.604,17.264 8.264,17.264 v1(10.288,19.288)
CK_P: C48.2 P1.18 U1.C9 | length 9.1
  Top Layer w0.152: P1.18@5.039,16.485 v3(6.198,16.485)
  Top Layer w0.254: v1(12.288,19.288) U1.C9@12.788,18.788
  Bottom Layer w0.152: v3(6.198,16.485) 8.026,16.485 10.326,18.784 11.784,18.784 v1(12.288,19.288)
D0_N: C45.1 P1.8 U1.A12 | length 6
  Top Layer w0.254: P1.8@5,21.524 6.292,21.524 C45.1@6.604,21.836 ; v1(10.288,22.288) U1.A12@10.788,21.788
  Bottom Layer w0.152: v3(6.96,21.819) 7.429,22.288 v1(10.288,22.288)
D0_P: C45.2 P1.9 U1.B12 | length 7.3
  Top Layer w0.254: P1.9@5,21.024 6.408,21.024 C45.2@6.604,20.828 ; v1(11.288,22.288) U1.B12@11.788,21.788
  Bottom Layer w0.152: v3(6.934,21.057) 7.645,21.768 10.768,21.768 v1(11.288,22.288)
D1_N: C46.1 P1.11 U1.A11 | length 6.5
  Top Layer w0.152: P1.11@5,20.024 6.079,20.024 v3(6.248,20.193)
  Top Layer w0.254: v1(10.288,21.288) U1.A11@10.788,20.788
  Bottom Layer w0.152: v3(6.248,20.193) 6.248,20.244 6.317,20.312 C46.1@6.604,20.312 7.079,20.312 8.055,21.288 v1(10.288,21.288)
D1_P: C46.2 P1.12 U1.C11 | length 9
  Top Layer w0.152: P1.12@5,19.524 6.206,19.524 v3(6.223,19.507)
  Top Layer w0.254: v1(12.288,21.288) U1.C11@12.788,20.788
  Bottom Layer w0.152: v3(6.223,19.507) 6.223,19.558 6.477,19.304 C46.2@6.604,19.304 6.756,19.304 8.23,20.777 11.777,20.777 v1(12.288,21.288)
D2_N: C47.1 P1.14 U1.A10 | length 6.7
  Top Layer w0.152: P1.14@5,18.524 6.34,18.524 C47.1@6.604,18.788 7.104,18.788 v3(7.29,18.974)
  Top Layer w0.254: v1(10.288,20.288) U1.A10@10.788,19.788
  Bottom Layer w0.152: v3(7.29,18.974) 8.604,20.288 v1(10.288,20.288)
D2_P: C47.2 P1.15 U1.B10 | length 7.9
  Top Layer w0.152: P1.15@5,18.024 7.153,18.024 v3(7.366,18.237)
  Top Layer w0.254: v1(11.288,20.288) U1.B10@11.788,19.788
  Bottom Layer w0.152: v3(7.366,18.237) 8.913,19.784 10.497,19.784 11.001,20.288 v1(11.288,20.288)
D3_N: C49.1 P1.20 U1.A8 | length 6.7
  Top Layer w0.152: C49.1@6.604,15.74 7.298,15.74 v3(7.315,15.723)
  Top Layer w0.254: P1.20@5,15.524 6.388,15.524 C49.1@6.604,15.74 ; v1(10.288,17.288) U1.A8@10.788,17.788
  Bottom Layer w0.152: v3(7.315,15.723) 7.849,15.723 9.414,17.288 v1(10.288,17.288)
D3_P: C49.2 P1.21 U1.B8 | length 8.2
  Top Layer w0.152: C49.2@6.604,14.732 v3(7.366,14.732)
  Top Layer w0.254: P1.21@5,15.024 6.312,15.024 C49.2@6.604,14.732 ; v1(11.288,17.288) U1.B8@11.788,17.788
  Bottom Layer w0.152: v3(7.366,14.732) 9.398,16.764 10.764,16.764 v1(11.288,17.288)
DATA: MCU1.23 U1.P10 U8.2 | length 41
  Top Layer w0.152: MCU1.23@23.076,34.556 25.769,34.556 27.127,33.198 v3(27.127,32.969) ; U1.P10@23.788,19.788 v1(24.288,20.288) ; v3(34.442,9.347) 34.674,9.347 U8.2@35.385,8.636
  Signal Layer 1 w0.152: v1(24.288,20.288) 24.815,19.761 30.505,19.761 v3(30.861,20.117) 27.635,23.343 27.635,32.461 v3(27.127,32.969)
  Bottom Layer w0.152: v3(30.861,20.117) 30.15,19.406 30.15,14.453 34.442,10.16 v3(34.442,9.347)
DONE: R43.1 U1.P13 | length 5.7
  Top Layer w0.152: U1.P13@23.788,22.788 v1(24.288,23.288) ; v3(26.924,23.8) 27.686,24.562 R43.1@27.686,25.611
  Bottom Layer w0.152: v1(24.288,23.288) 24.8,23.8 v3(26.924,23.8)
FLASH_CS: U1.T3 U8.1 | length 15
  Top Layer w0.152: U1.T3@25.788,12.788 v1(26.288,12.288) 26.904,12.288 27.483,11.709 27.483,10.16 28.626,9.017 28.626,6.782 29.261,6.147 31.699,6.147 32.842,7.29 U8.1@35.309,7.29
FLASH_DI: U1.T10 U8.5 | length 13.9
  Top Layer w0.152: U1.T10@25.788,19.788 v1(26.288,20.288) ; v1@26.332,20.244 v3@29.21,20.244 ; U8.5@29.385,11.176 v3(30.807,12.598)
  Bottom Layer w0.152: v3(29.21,20.218) 29.54,19.888 29.54,14.2 30.807,12.933 v3(30.807,12.598)
FPGA_CLK: MCU1.58 U1.C10 | length 17.5
  Top Layer w0.152: v3(10.287,34.493) 10.35,34.556 MCU1.58@11.976,34.556 ; v1(12.288,20.288) U1.C10@12.788,19.788
  Signal Layer 1 w0.152: v3(10.287,34.493) 11.834,32.946 11.834,20.834 12.288,20.381 v1(12.288,20.288)